# Altium PCB SKC_PCB.PcbDoc (part 2 of 3)
Units mm, origin at the board's own origin, x right, y up, seen from the top; angles counter-clockwise.
Board outline 160.02 x 100.08 mm, 2 copper layers (Top Layer, Bottom Layer); 399 components, 429 nets, 1319 pads, 182 vias.
Unrouted connection lines stored in the file: 43.
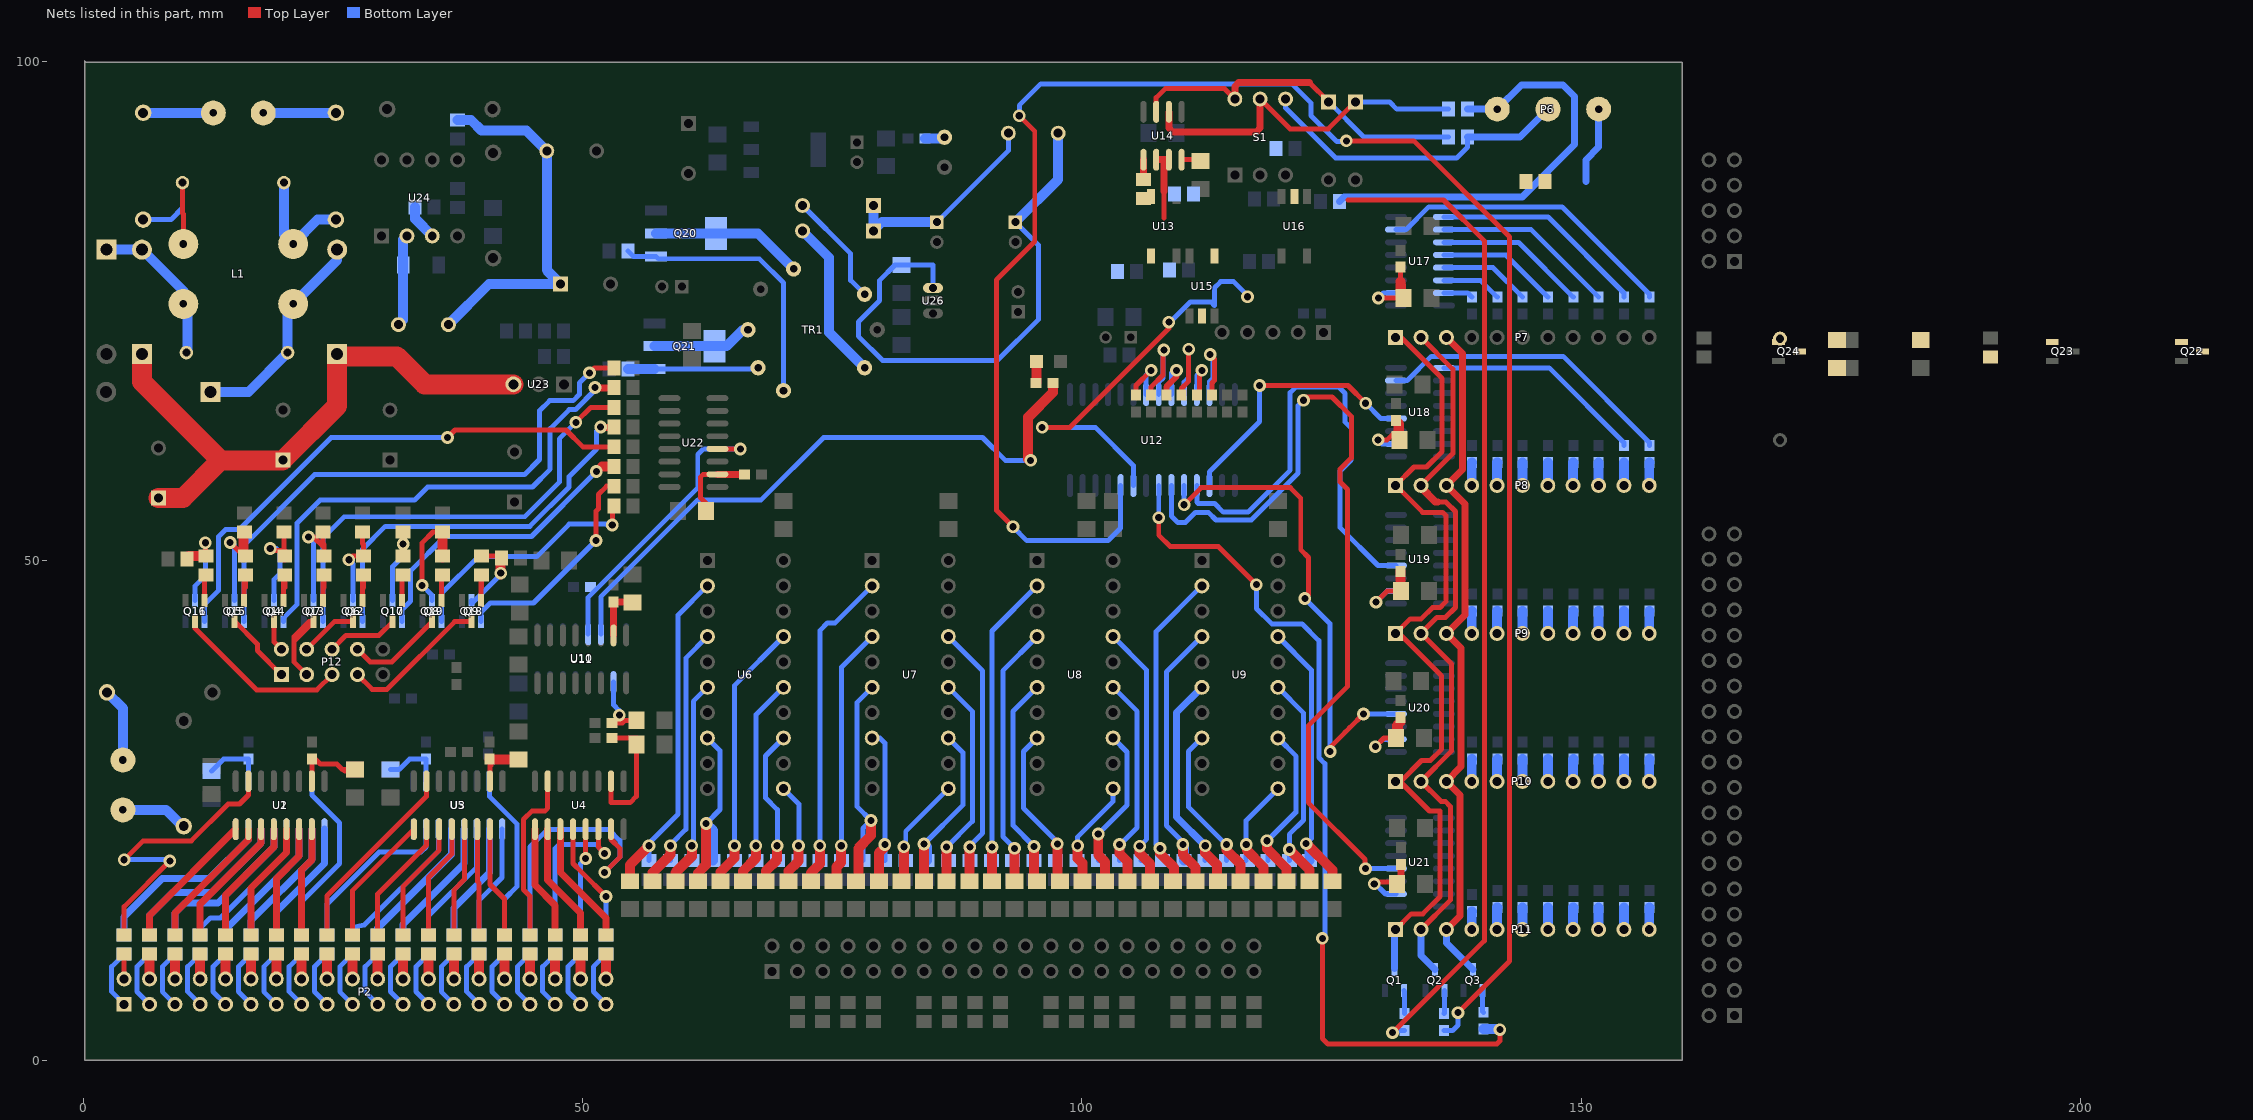
[diagram p2: the nets of this part, all layers, seen from the top]

## Via types
v1: diameter 1.27, hole 0.711, Top Layer to Bottom Layer, 182 vias

## Nets (pads, with @x,y where several pads share a name; then routed paths per layer and width w, separated by ;. In a path a pad name is that pad's centre, name@x,y a point inside that pad or via, vN(x,y) a via of type N, cw(c..) or ccw(c..) an arc to the next point about the centre after c; other vN are vias at no path point) (continued)
DISP2_LATCH: U12.3 U18.12 | length 27.1
  Top Layer w0.5: v1(117.805,67.564) 126.644,67.564 v1(128.422,65.786)
  Bottom Layer w0.5: U12.3@112.776,57.553 112.776,58.928 117.805,63.957 v1(117.805,67.564) ; v1(128.422,65.786) 129.946,64.262 U18.12@131.458,64.262
DISP2_SEG_A: P8.11 R145.2 | length 2.3
  Bottom Layer w1: P8.11@156.828,57.563 156.828,59.839 R145.2@156.845,59.856
DISP2_SEG_B: P8.10 R146.2 | length 2.3
  Bottom Layer w1: P8.10@154.288,57.563 154.288,59.839 R146.2@154.305,59.856
DISP2_SEG_C: P8.9 R147.2 | length 2.3
  Bottom Layer w1: P8.9@151.748,57.563 151.748,59.839 R147.2@151.765,59.856
DISP2_SEG_D: P8.8 R149.2 | length 2.3
  Bottom Layer w1: P8.8@149.208,57.563 149.208,59.839 R149.2@149.225,59.856
DISP2_SEG_DP: P8.4 R153.2 | length 2.3
  Bottom Layer w1: P8.4@139.048,57.563 139.048,59.839 R153.2@139.065,59.856
DISP2_SEG_E: P8.7 R150.2 | length 2.3
  Bottom Layer w1: P8.7@146.668,57.563 146.668,59.839 R150.2@146.685,59.856
DISP2_SEG_F: P8.6 R151.2 | length 2.3
  Bottom Layer w1: P8.6@144.128,57.563 144.128,59.839 R151.2@144.145,59.856
DISP2_SEG_G: P8.5 R152.2 | length 2.3
  Bottom Layer w1: P8.5@141.588,57.563 141.588,59.839 R152.2@141.605,59.856
DISP3_LATCH: U12.4 U19.12 | length 48.3
  Bottom Layer w0.5: U12.4@111.506,57.553 111.506,55.88 111.638,55.748 113.292,55.748 114.168,54.872 116.634,54.872 120.853,59.091 120.853,66.85 121.412,67.41 125.727,67.41 126.365,66.772 126.365,63.892 126.979,63.279 126.979,60.1 125.861,58.983 125.861,53.33 129.661,49.53 U19.12@131.458,49.53
DISP3_SEG_A: P9.11 R154.2 | length 2.3
  Bottom Layer w1: P9.11@156.828,42.735 156.828,44.98 R154.2@156.845,44.997
DISP3_SEG_B: P9.10 R155.2 | length 2.3
  Bottom Layer w1: P9.10@154.288,42.735 154.288,44.98 R155.2@154.305,44.997
DISP3_SEG_C: P9.9 R156.2 | length 2.3
  Bottom Layer w1: P9.9@151.748,42.735 151.748,44.98 R156.2@151.765,44.997
DISP3_SEG_D: P9.8 R158.2 | length 2.3
  Bottom Layer w1: P9.8@149.208,42.735 149.208,44.98 R158.2@149.225,44.997
DISP3_SEG_DP: P9.4 R163.2 | length 2.3
  Bottom Layer w1: P9.4@139.048,42.735 139.048,44.98 R163.2@139.065,44.997
DISP3_SEG_E: P9.7 R159.2 | length 2.3
  Bottom Layer w1: P9.7@146.668,42.735 146.668,44.98 R159.2@146.685,44.997
DISP3_SEG_F: P9.6 R160.2 | length 2.3
  Bottom Layer w1: P9.6@144.128,42.735 144.128,44.98 R160.2@144.145,44.997
DISP3_SEG_G: P9.5 R162.2 | length 2.3
  Bottom Layer w1: P9.5@141.588,42.735 141.588,44.98 R162.2@141.605,44.997
DISP4_LATCH: U12.5 U20.12 | length 50.1
  Top Layer w0.5: v1(110.236,55.626) 111.938,57.328 120.879,57.328 121.92,56.286 121.92,51.119 122.703,50.335 122.703,46.605 v1(122.326,46.228) ; v1(124.866,30.912) 124.866,31.339 126.373,32.845 126.373,32.85 126.815,33.291 126.819,33.291 v1(128.199,34.671)
  Bottom Layer w0.5: v1(110.236,55.626) U12.5@110.236,57.553 ; v1(122.326,46.228) 124.842,43.713 124.842,30.936 v1(124.866,30.912) ; v1(128.199,34.671) U20.12@131.458,34.671
DISP4_SEG_A: P10.11 R164.2 | length 2.2
  Bottom Layer w1: P10.11@156.828,27.908 156.828,30.121 R164.2@156.845,30.138
DISP4_SEG_B: P10.10 R165.2 | length 2.2
  Bottom Layer w1: P10.10@154.288,27.908 154.288,30.121 R165.2@154.305,30.138
DISP4_SEG_C: P10.9 R166.2 | length 2.2
  Bottom Layer w1: P10.9@151.748,27.908 151.748,30.121 R166.2@151.765,30.138
DISP4_SEG_D: P10.8 R168.2 | length 2.2
  Bottom Layer w1: P10.8@149.208,27.908 149.208,30.121 R168.2@149.225,30.138
DISP4_SEG_DP: P10.4 R173.2 | length 2.2
  Bottom Layer w1: P10.4@139.048,27.908 139.048,30.121 R173.2@139.065,30.138
DISP4_SEG_E: P10.7 R169.2 | length 2.2
  Bottom Layer w1: P10.7@146.668,27.908 146.668,30.121 R169.2@146.685,30.138
DISP4_SEG_F: P10.6 R170.2 | length 2.2
  Bottom Layer w1: P10.6@144.128,27.908 144.128,30.121 R170.2@144.145,30.138
DISP4_SEG_G: P10.5 R172.2 | length 2.2
  Bottom Layer w1: P10.5@141.588,27.908 141.588,30.121 R172.2@141.605,30.138
DISP5_LATCH: U12.6 U21.12 | length 84.7
  Top Layer w0.5: v1(122.199,66.091) 122.53,66.421 125.052,66.421 126.99,64.484 126.99,60.315 125.857,59.182 125.857,57.916 126.621,57.152 126.621,37.43 122.682,33.491 122.682,25.781 128.372,20.091 v1@128.372,19.71
  Bottom Layer w0.5: U12.6@108.966,57.553 108.966,54.483 109.601,53.848 110.363,53.848 111.375,54.86 112.67,54.86 113.428,54.102 116.967,54.102 121.666,58.801 121.666,65.557 v1(122.199,66.091) ; v1@128.245,19.177 U21.12@131.458,19.177
  other v1: 128.397,19.177
DISP5_SEG_A: P11.11 R174.2 | length 2.2
  Bottom Layer w1: P11.11@156.828,13.081 156.828,15.262 R174.2@156.845,15.279
DISP5_SEG_B: P11.10 R175.2 | length 2.2
  Bottom Layer w1: P11.10@154.288,13.081 154.288,15.262 R175.2@154.305,15.279
DISP5_SEG_C: P11.9 R176.2 | length 2.2
  Bottom Layer w1: P11.9@151.748,13.081 151.748,15.262 R176.2@151.765,15.279
DISP5_SEG_D: P11.8 R178.2 | length 2.2
  Bottom Layer w1: P11.8@149.208,13.081 149.208,15.262 R178.2@149.225,15.279
DISP5_SEG_DP: P11.4 R183.2 | length 1.8
  Bottom Layer w1: P11.4@139.048,13.081 139.048,14.881 R183.2@139.065,14.898
DISP5_SEG_E: P11.7 R179.2 | length 2.2
  Bottom Layer w1: P11.7@146.668,13.081 146.668,15.262 R179.2@146.685,15.279
DISP5_SEG_F: P11.6 R180.2 | length 2.2
  Bottom Layer w1: P11.6@144.128,13.081 144.128,15.262 R180.2@144.145,15.279
DISP5_SEG_G: P11.5 R182.2 | length 2.2
  Bottom Layer w1: P11.5@141.588,13.081 141.588,15.262 R182.2@141.605,15.279
DISP_DIG1: P7.3 P8.3 P9.3 P10.3 P11.3 Q3.3 | length 69.7
  Top Layer w0.7: P11.3@136.508,13.081 137.86,14.433 137.86,26.556 P10.3@136.508,27.908 137.987,29.387 137.987,41.256 P9.3@136.508,42.735 138.368,44.596 138.368,55.703 P8.3@136.508,57.563 138.114,59.169 138.114,70.784 P7.3@136.508,72.39
  Bottom Layer w0.7: P11.3@136.508,13.081 136.508,11.735 Q3.3@139.192,9.051
DISP_DIG2: P7.2 P8.2 P9.2 P10.2 P11.2 Q2.3 | length 78.4
  Top Layer w0.5: P11.2@133.968,13.081 136.906,16.019 136.906,25.4 136.398,25.908 135.968,25.908 P10.2@133.968,27.908 137.033,30.973 137.033,39.67 P9.2@133.968,42.735 135.555,44.323 136.398,44.323 137.414,45.339 137.414,54.943 136.477,55.88 135.651,55.88 P8.2@133.968,57.563 137.16,60.755 137.16,69.198 P7.2@133.968,72.39
  Top Layer w0.7: P10.2@133.968,27.703 P10.2@133.968,27.908 ; P8.2@133.968,57.563 133.968,57.294 135.382,55.88 135.651,55.88
  Bottom Layer w0.7: P11.2@133.968,13.081 133.968,10.465 Q2.3@135.382,9.051
DISP_DIG3: P7.1 P8.1 P9.1 P10.1 P11.1 Q1.3 | length 84.8
  Top Layer w0.5: P11.1@131.428,13.081 132.991,14.644 134.151,14.644 135.89,16.383 135.89,24.954 134.812,24.954 131.858,27.908 P10.1@131.428,27.908 131.921,27.908 134.013,30 134.902,30 136.034,31.132 136.034,38.464 131.762,42.735 P9.1@131.428,42.735 132.888,44.196 133.985,44.196 135.128,45.339 135.89,45.339 136.46,45.909 136.46,54.548 136.144,54.864 134.127,54.864 P8.1@131.428,57.563 133.263,59.397 134.516,59.397 136.079,60.96 136.079,68.264 131.953,72.39 P7.1@131.428,72.39
  Top Layer w0.7: P11.1@131.318,13.191 P11.1@131.428,13.081
  Bottom Layer w0.7: Q1.3@131.301,9.161 P11.1@131.301,13.081
DISP_DIG_1: R161.2 U12.9 | length 141.4
  Top Layer w0.5: v1(96.012,63.373) 98.806,63.373 108.712,73.279 v1(108.712,73.914) ; 126.67,86.157 136.22,86.157 140.31,82.067 140.31,11.938 v1(131.115,2.743)
  Bottom Layer w0.5: v1(96.012,63.373) 101.346,63.373 105.156,59.563 U12.9@105.156,57.553 ; v1(108.712,73.914) 108.712,73.787 110.871,75.946 112.912,75.946 113.289,75.57 113.289,77.348 113.903,77.962 115.205,77.962 v1@116.459,76.708 ; v1(131.115,2.743) 131.332,2.96 R161.2@132.334,2.96
  other v1: 116.586,76.454
DISP_DIG_10: R171.2 U12.10 | length 201.1
  Top Layer w0.5: v1(93.091,53.416) 91.44,55.067 91.44,78.156 95.275,81.991 95.275,93.04 v1(93.726,94.59) ; v1(126.492,92.075) 133.223,92.075 142.85,82.448 142.85,9.928 v1(137.668,4.746)
  Bottom Layer w0.5: v1(93.091,53.416) 94.488,52.019 102.616,52.019 103.886,53.289 U12.10@103.886,57.553 ; v1(93.726,94.59) 93.726,95.631 95.885,97.79 121.031,97.79 122.936,95.885 122.936,94.615 125.539,92.011 v1@126.428,92.011 ; R171.2@136.271,2.96 137.132,2.96 137.668,3.496 v1(137.668,4.746)
DISP_DIG_100: R181.2 U12.7 | length 90
  Top Layer w0.5: v1(107.696,54.331) 107.696,52.578 108.839,51.435 113.665,51.435 117.64,47.46 117.805,47.625 v1(117.475,47.625) ; v1(124.079,12.192) 124.079,2.159 124.634,1.604 141.558,1.604 141.859,1.905 v1(141.859,3.048)
  Bottom Layer w0.5: v1(107.696,54.331) U12.7@107.696,57.553 ; v1(117.475,47.625) 117.805,47.625 117.475,47.955 117.475,45.237 119.024,43.688 122.051,43.688 123.727,42.012 123.727,30.298 124.333,29.693 124.333,12.192 v1(124.079,12.192)
  Bottom Layer w1: R181.2@140.208,3.087 141.82,3.087 v1(141.859,3.048)
ERR1_LATCH: R221.1 U10.5 U22.12 | length 29.3
  Top Layer w0.5: U22.12@63.487,61.214 v1(65.786,61.214)
  Bottom Layer w0.5: U10.5@50.546,42.659 50.546,46.355 61.519,57.328 61.519,60.655 62.078,61.214 v1(65.786,61.214)
NetC2_2: C2.2 R4.1 U1.10 | length 6.4
  Bottom Layer w0.5: C2.2@12.827,28.959 14.006,30.138 R4.1@16.51,30.138 U1.10@16.51,27.927
NetC4_2: C4.2 R13.1 U2.10 | length 8.6
  Top Layer w0.5: U2.10@22.86,27.927 R13.1@22.86,30.138 23.241,30.138 23.737,29.642 25.375,29.642 25.93,29.086 26.032,29.086 ; C4.2@27.178,29.086 26.032,29.086 ; C4.2@27.559,29.086 27.429,28.956 26.162,28.956 26.032,29.086
NetC6_2: C6.2 R22.1 U3.10 | length 5.2
  Top Layer w0.5: U3.10@40.703,27.927 40.703,29.464 ; R22.1@40.703,30.075 40.703,29.464 ; 40.785,29.482 40.703,29.464
  Top Layer w1: R22.1@40.64,30.138 40.682,30.096 C6.2@43.561,30.096
NetC8_2: C8.2 R31.1 U4.10 | length 13.4
  Top Layer w0.5: U4.10@52.832,27.927 52.832,25.789 54.742,25.789 55.369,26.416 C8.2@55.369,31.623 55.369,32.258 R31.1@52.92,32.258
  Top Layer w0.7: R31.1@52.832,32.17 R31.1@52.92,32.258
NetC10_2: C10.2 R42.1 U5.10 | length 6.2
  Bottom Layer w0.5: C10.2@30.734,29.086 31.598,29.086 32.65,30.138 R42.1@34.29,30.138 U5.10@34.29,27.927
NetC12_1: C12.1 R56.2 U6.2 | length 34.3
  Top Layer w1: C12.1@54.737,17.91 54.737,19.558 v1(56.642,21.463)
  Bottom Layer w0.5: R56.2@56.642,20 v1(56.642,21.463) 56.642,21.717 59.563,24.638 59.563,44.577 U6.2@62.484,47.498
NetC13_1: C13.1 R57.2 U6.4 | length 28
  Top Layer w1: C13.1@57.003,17.91 57.003,18.776 58.801,20.574 v1@58.801,21.209
  Bottom Layer w0.5: R57.2@58.785,20 58.785,21.574 60.325,23.114 60.325,40.259 U6.4@62.484,42.418
  other v1: 58.781,21.463
NetC14_1: C14.1 R58.2 U6.6 | length 22.2
  Top Layer w1: C14.1@59.268,17.91 59.268,18.755 60.919,20.406 v1(60.919,21.463)
  Bottom Layer w0.5: R58.2@60.927,20 61.079,20.152 61.079,35.933 U6.6@62.484,37.338
NetC15_1: C15.1 R59.2 U6.8 | length 19.8
  Top Layer w1: C15.1@61.534,17.91 61.534,18.735 62.357,19.558 v1(62.357,23.698)
  Bottom Layer w0.5: v1(62.357,23.698) 63.754,25.095 63.754,30.988 U6.8@62.484,32.258
  Bottom Layer w1: v1(62.357,23.698) 63.07,22.985 R59.2@63.07,20
NetC16_2: C16.2 R63.2 U6.17 | length 28.4
  Top Layer w1: C16.2@63.799,18.161 63.799,18.841 65.196,20.238 v1(65.196,21.463)
  Bottom Layer w0.5: v1(65.196,21.463) v1@65.212,21.524 ; R63.2@65.212,20 v1@65.212,21.524 ; U6.17@70.104,42.418 65.212,37.526 v1@65.212,21.524
NetC17_2: C17.2 R62.2 U6.15 | length 22.6
  Top Layer w1: C17.2@66.065,17.91 66.065,18.948 67.335,20.218 v1(67.335,21.463)
  Bottom Layer w0.5: R62.2@67.355,20 67.355,34.589 U6.15@70.104,37.338
NetC18_2: C18.2 R61.2 U6.13 | length 16.6
  Top Layer w1: 68.33,18.832 68.33,18.927 69.473,20.07 v1(69.473,21.463)
  Bottom Layer w0.5: R61.2@69.498,20 69.498,25.076 68.309,26.265 68.309,30.463 U6.13@70.104,32.258
NetC19_2: C19.2 R60.2 U6.11 | length 11.6
  Top Layer w0.5: 71.612,19.971 71.64,20
  Top Layer w1: C19.2@70.612,18.161 70.612,18.923 71.612,19.923 71.612,19.971 v1(71.612,21.463)
  Bottom Layer w0.5: U6.11@70.104,27.178 71.64,25.642 R60.2@71.64,20
NetC21_1: C21.1 R72.2 U7.2 | length 35.6
  Top Layer w0.5: C21.1@72.861,17.91 72.861,18.759 72.861,19.078 73.75,19.967 73.783,20
  Top Layer w1: 72.861,18.759 73.75,19.648 73.75,19.967 v1(73.75,21.463)
  Bottom Layer w0.5: R72.2@73.783,20 73.783,43.049 74.521,43.787 75.283,43.787 U7.2@78.994,47.498
NetC22_1: C22.1 R73.2 U7.4 | length 27.6
  Top Layer w0.5: C22.1@75.127,17.91 C22.1@75.127,18.231 ; 75.889,19.963 75.926,20
  Top Layer w1: C22.1@75.127,18.231 75.438,18.542 75.438,19.361 75.889,19.812 75.889,19.963 v1(75.889,21.463)
  Bottom Layer w0.5: R73.2@75.926,20 75.926,39.35 U7.4@78.994,42.418
NetC23_1: C23.1 R74.2 U7.6 | length 25.6
  Top Layer w1: C23.1@77.392,17.91 77.597,18.115 77.597,21.209 78.867,22.479 v1(78.867,24.003)
  Bottom Layer w0.5: R74.2@78.068,20 78.068,23.204 v1(78.867,24.003) 77.49,25.38 77.49,35.834 U7.6@78.994,37.338
NetC24_1: C24.1 R75.2 U7.8 | length 17.2
  Top Layer w0.5: v1@80.264,21.336 v1(80.264,21.59)
  Top Layer w1: C24.1@79.658,17.91 79.658,20.73 v1@80.264,21.336
  Bottom Layer w0.5: U7.8@78.994,32.258 79.756,32.258 80.264,31.75 v1(80.264,21.59) 80.264,20 R75.2@80.211,20
NetC25_2: C25.2 R79.2 U7.17 | length 27.8
  Top Layer w1: C25.2@88.72,17.91 v1@88.72,21.336
  Bottom Layer w0.5: U7.17@86.614,42.418 90.043,38.989 90.043,22.733 88.781,21.471 R79.2@88.781,20
  other v1: 88.773,21.336
NetC26_2: C26.2 R78.2 U7.15 | length 22.6
  Top Layer w1: C26.2@86.454,17.91 v1(86.454,21.336)
  Bottom Layer w0.5: v1(86.454,21.336) 89.027,23.909 89.027,34.925 U7.15@86.614,37.338 ; R78.2@86.639,20 v1@86.639,21.152
NetC27_2: C27.2 R77.2 U7.13 | length 17.9
  Top Layer w1: C27.2@84.189,17.91 v1(84.189,21.642)
  Bottom Layer w0.5: v1(84.189,21.642) 88.073,25.527 88.073,30.799 U7.13@86.614,32.258
  Bottom Layer w1: R77.2@84.496,20 v1@84.496,21.335
NetC28_2: C28.2 R76.2 U7.11 | length 17.2
  Top Layer w0.5: C28.2@81.923,17.91 81.923,18.872 82.169,19.118 v1(82.169,21.361)
  Top Layer w1: C28.2@82.177,18.037 v1@82.177,21.209
  Bottom Layer w0.5: v1(82.169,21.361) 82.169,20 R76.2@82.353,20 82.353,22.917 U7.11@86.614,27.178
NetC30_1: C30.1 R88.2 U8.2 | length 32.7
  Top Layer w1: C30.1@90.985,17.91 v1(90.985,21.336)
  Bottom Layer w0.5: R88.2@90.924,20 v1@90.924,21.275 ; v1(90.985,21.336) 90.985,42.979 U8.2@95.504,47.498
NetC31_1: C31.1 R89.2 U8.4 | length 26.4
  Top Layer w1: C31.1@93.251,17.91 v1(93.251,21.209)
  Bottom Layer w0.5: v1(93.251,21.209) 92.075,22.385 92.075,38.989 U8.4@95.504,42.418
NetC32_1: C32.1 R90.2 U8.6 | length 22.9
  Top Layer w1: v1@95.135,21.463 v1(95.209,21.389) 95.209,18.217 C32.1@95.516,17.91
  Bottom Layer w0.5: v1(95.209,21.389) 93.091,23.507 93.091,34.925 U8.6@95.504,37.338
  Bottom Layer w1: R90.2@95.209,20 v1(95.209,21.389)
NetC33_1: C33.1 R91.2 U8.8 | length 19.4
  Top Layer w0.5: v1@97.352,21.598 97.352,22.028 v1(97.536,21.66) v1@97.782,21.168
  Top Layer w1: v1@97.352,21.598 97.536,21.414 97.536,18.156 C33.1@97.782,17.91
  Bottom Layer w0.5: U8.8@95.504,32.258 94.15,30.904 94.15,25.23 97.352,22.028 R91.2@97.352,20
NetC34_2: C34.2 R95.2 U8.17 | length 27.9
  Top Layer w1: v1(105.791,21.426) 105.791,20.701 106.844,19.648 C34.2@106.844,17.91
  Bottom Layer w0.5: U8.17@103.124,42.418 106.488,39.054 106.488,22.123 v1(105.791,21.426) ; R95.2@105.922,20 v1@105.922,21.295
NetC35_2: C35.2 R94.2 U8.15 | length 23.1
  Top Layer w1: v1(103.759,21.59) 103.759,20.701 104.578,19.882 C35.2@104.578,17.91
  Bottom Layer w0.5: U8.15@103.124,37.338 105.534,34.928 105.534,23.291 103.779,21.537 R94.2@103.779,20
NetC36_2: C36.2 R93.2 U8.13 | length 19
  Top Layer w1: v1(101.637,22.643) 101.637,20.537 102.313,19.861 C36.2@102.313,17.91
  Bottom Layer w0.5: R93.2@101.637,20 v1(101.637,22.643) 104.521,25.527 104.521,30.861 U8.13@103.124,32.258
NetC37_2: C37.2 R92.2 U8.11 | length 12.3
  Top Layer w1: v1(99.568,21.463) 99.568,20.193 100.047,19.714 C37.2@100.047,17.91
  Bottom Layer w0.5: R92.2@99.494,20 v1@99.494,21.389 ; v1(99.568,21.463) 99.568,22.352 103.124,25.908 U8.11@103.124,27.178
NetC39_1: C39.1 R104.2 U9.2 | length 32.1
  Top Layer w1: v1(107.823,21.209) 107.823,20.701 109.22,19.304 C39.1@109.22,18.034
  Bottom Layer w0.5: v1(107.823,21.209) 107.442,21.59 107.442,42.926 U9.2@112.014,47.498
NetC40_1: C40.1 R105.2 U9.4 | length 28.7
  Top Layer w1: v1(110.109,21.59) 110.109,20.574 111.375,19.308 C40.1@111.375,17.91
  Bottom Layer w0.5: v1(110.109,21.59) 110.109,21.844 108.458,23.495 108.458,38.862 U9.4@112.014,42.418
  Bottom Layer w1: R105.2@110.207,20 v1@110.207,21.492
NetC41_1: C41.1 R106.2 U9.6 | length 23.6
  Top Layer w1: v1@112.243,21.463 v1@112.244,21.472 ; v1(112.35,21.463) 112.35,20.746 113.513,19.583 C41.1@113.513,17.91
  Bottom Layer w0.5: R106.2@112.35,20 v1(112.35,21.463)
  Bottom Layer w0.7: U9.6@112.014,37.338 109.474,34.798 109.474,24.339 v1(112.35,21.463)
NetC42_1: C42.1 R107.2 U9.8 | length 18.7
  Top Layer w1: v1(114.493,21.59) 114.493,21.016 115.906,19.603 C42.1@115.906,17.91
  Bottom Layer w0.5: U9.8@112.014,32.258 110.66,30.904 110.66,25.357 114.493,21.524 R107.2@114.493,20
NetC43_2: C43.2 R111.2 U9.17 | length 28.5
  Top Layer w1: v1(122.465,21.674) 125.095,19.044 C43.2@125.095,17.91
  Bottom Layer w0.5: U9.17@119.634,42.418 122.973,39.079 122.973,22.182 v1(122.465,21.674)
  Bottom Layer w1: R111.2@122.809,20 v1@122.809,21.33
NetC44_2: C44.2 R110.2 U9.15 | length 23
  Top Layer w1: v1(120.777,21.082) 122.798,19.061 C44.2@122.798,17.91
  Bottom Layer w0.5: U9.15@119.634,37.338 122.219,34.753 122.219,24.048 120.777,22.606 R110.2@120.777,20
NetC45_2: C45.2 R109.2 U9.13 | length 23.2
  Top Layer w1: v1(118.542,21.971) 118.542,21.158 120.5,19.2 C45.2@120.5,17.91
  Bottom Layer w0.5: v1(118.542,21.971) 121.465,24.894 ; R109.2@118.618,20 118.618,21.971 121.465,24.818 121.465,24.894 ; U9.13@119.634,32.258 121.465,30.427 121.465,24.894
NetC46_2: C46.2 R108.2 U9.11 | length 12.7
  Top Layer w1: v1@116.52,21.463 116.52,21.021 118.203,19.338 C46.2@118.203,17.91
  Bottom Layer w0.5: R108.2@116.459,20 116.459,24.003 U9.11@119.634,27.178
  other v1: 116.459,21.59
NetC49_2: C49.2 R112.2 U10.10 | length 6.1
  Top Layer w0.5: R112.2@52.92,33.782 53.67,33.782 54,33.782 54.254,34.036 C49.2@55.369,34.036
  Bottom Layer w0.5: U10.10@53.086,37.859 53.086,35.585 53.67,35.001 v1(53.67,34.544)
NetC50_2: C50.2 R113.2 U11.10 | length 5.3
  Top Layer w0.7: U11.10@53.086,42.532 R113.2@53.086,45.886 54.949,45.886 C50.2@54.991,45.844
NetC56_2: C56.2 R139.1 U17.10 | length 9.1
  Top Layer w0.5: v1(129.692,76.327) C56.2@132.204,76.327 132.204,77.699 131.904,77.999 R139.1@131.904,79.414
  Top Layer w1: C56.2@131.904,76.627 131.904,77.999
  Bottom Layer w0.5: v1(129.692,76.327) 130.2,76.835 U17.10@131.458,76.835
NetC58_2: C58.2 R148.1 U18.10 | length 8.5
  Top Layer w0.5: v1(129.667,62.128) 130.581,62.128 C58.2@131.445,62.992 ; R148.1@131.445,64.047 C58.2@131.445,62.992 ; C58.2@131.823,62.103 131.777,62.103 131.445,62.103 C58.2@131.445,62.992
  Top Layer w1: R148.1@131.445,64.047 131.777,63.715 C58.2@131.777,62.103
  Bottom Layer w0.5: v1(129.667,62.128) 130.073,61.722 U18.10@131.458,61.722
NetC60_2: C60.2 R157.1 U19.10 | length 7.4
  Top Layer w0.5: v1(129.464,45.872) 130.581,46.99 C60.2@131.95,46.99
  Top Layer w1: R157.1@131.904,48.934 131.904,47.036 C60.2@131.95,46.99
  Bottom Layer w0.5: v1(129.464,45.872) 130.581,46.99 U19.10@131.458,46.99
NetC62_2: C62.2 R167.1 U20.10 | length 9.1
  Top Layer w0.5: v1(129.388,31.394) 130.251,32.258 131.569,32.258 131.904,32.258 131.904,33.86 R167.1@131.904,34.329
  Top Layer w1: C62.2@131.569,32.258 131.572,32.261 131.572,33.528 R167.1@131.904,33.86
  Bottom Layer w0.5: v1(129.388,31.394) 130.124,32.131 U20.10@131.458,32.131
NetC64_2: C64.2 R177.1 U21.10 | length 7.4
  Top Layer w0.5: v1@129.184,17.856 C64.2@131.064,17.856 ; C64.2@131.569,17.653 C64.2@131.953,17.653
  Top Layer w0.7: C64.2@131.953,17.275 131.953,17.653 R177.1@131.953,19.597
  Bottom Layer w0.5: v1@129.184,17.856 130.404,16.637 U21.10@131.458,16.637
  other v1: 129.286,17.653
NetC66_2: C66.2 R198.1 U22.10 | length 8.2
  Top Layer w0.5: C66.2@62.36,54.991 62.36,55.75 61.814,56.296 61.814,58.42 62.068,58.674 U22.10@63.487,58.674
  Top Layer w0.7: U22.10@63.487,58.674 R198.1@66.206,58.674
NetC67_1: C67.1 C68.1 D4.2 D6.2 U23.3 | length 59.6
  Top Layer w0.5: D4.2@25.4,70.485 D4.2@25.4,70.716
  Top Layer w1: C68.1@19.941,60.071 C68.1@19.981,60.111
  Top Layer w2: D6.2@5.842,70.716 5.842,67.945 13.716,60.071 ; C67.1@7.493,56.301 9.946,56.301 13.716,60.071 ; C68.1@19.941,60.071 13.716,60.071 ; C68.1@19.981,60.111 25.4,65.53 25.4,70.485 31.369,70.485 34.163,67.691 U23.3@43.053,67.691
NetC73_1: C73.1 L1.3 R212.1 | length 13.1
  Top Layer w0.5: C73.1@9.906,87.884 9.906,84.848 9.994,84.76 L1.3@9.994,81.74
  Bottom Layer w0.5: R212.1@5.969,84.185 8.747,84.185 9.906,85.344 C73.1@9.906,87.884
NetC73_2: C73.2 L1.1 R209.1 | length 11.8
  Bottom Layer w1: C73.2@20.066,87.884 20.066,82.668 L1.1@20.994,81.74 23.439,84.185 R209.1@25.273,84.185
NetC75_1: C75.1 D6.1 D7.2 L1.4 | length 15.8
  Bottom Layer w1: D7.2@2.286,81.176 D6.1@5.842,81.176 9.994,77.024 L1.4@9.994,75.74 10.414,75.32 10.414,70.993 C75.1@10.287,70.866
NetC75_2: C75.2 D4.1 D5.2 L1.2 | length 21.7
  Bottom Layer w1: D5.2@12.723,66.929 16.51,66.929 C75.2@20.447,70.866 20.447,75.193 L1.2@20.994,75.74 25.4,80.146 D4.1@25.4,81.176
NetC77_2: C77.2 U24.3 | length 3.6
  Bottom Layer w1: C77.2@33.213,85.471 33.213,84.262 U24.3@34.925,82.55
NetC78_1: C78.1 L2.2 L3.1 R216.2 | length 37.1
  Bottom Layer w1: L2.2@36.536,73.66 40.6,77.724 C78.1@47.792,77.724 46.395,79.121 L3.1@46.395,91.059 44.363,93.091 39.878,93.091 38.801,94.168 R216.2@37.465,94.168
NetC84_2: C84.2 C86.1 L4.2 U26.3 | length 56.9
  Bottom Layer w0.5: U26.3@85.09,77.343 85.09,79.632 C84.2@81.915,79.632 81.283,79.632 79.748,78.097 79.748,76.08 77.597,73.929 77.597,72.517 80.043,70.071 91.534,70.071 95.631,74.168 95.631,81.645 C86.1@93.345,83.931
  Bottom Layer w1: C86.1@93.345,83.931 97.623,88.209 L4.2@97.623,92.837
NetC88_1: C88.1 D10.2 D11.2 L4.1 | length 21.1
  Bottom Layer w0.5: C88.1@85.471,83.931 92.623,91.083 L4.1@92.623,92.837
  Bottom Layer w1: D10.2@79.115,85.598 D11.2@79.115,83.058 79.988,83.931 C88.1@85.471,83.931
NetD1_2: D1.2 R116.2 | length 2.2
  Top Layer w1: R116.2@95.416,67.818 95.447,67.849 D1.2@95.447,69.977 D1.2@95.416,69.946
NetD2_2: D2.2 R131.2 S1.5 U14.6 | length 35.5
  Top Layer w0.5: S1.5@117.856,96.266 120.843,93.279 124.685,93.279 D2.2@127.381,95.975
  Top Layer w0.7: U14.6@108.712,94.983 108.712,93.345 109.093,92.964 117.475,92.964 117.856,93.345 S1.5@117.856,96.266
  Bottom Layer w0.5: D2.2@127.381,95.975 130.812,95.975 131.537,95.25 R131.2@136.718,95.25
NetD3_2: D3.2 R132.2 S1.6 U14.7 | length 35.4
  Top Layer w0.5: U14.7@107.442,94.983 107.442,96.393 108.348,97.299 114.283,97.299 S1.6@115.316,96.266 ; 122.791,97.899 D3.2@124.714,95.975
  Top Layer w0.7: S1.6@115.189,96.139 S1.6@115.316,96.266 115.316,97.536 115.697,97.917 122.809,97.917 122.791,97.899
  Bottom Layer w0.5: D3.2@124.714,95.975 128.233,92.456 R132.2@136.718,92.456
NetD8_2: D8.2 L2.1 U24.2 | length 9.2
  Bottom Layer w1: L2.1@31.536,73.66 32.007,74.131 D8.2@32.007,79.629 32.007,82.172 U24.2@32.385,82.55
NetD9_2: D9.2 R218.2 | length 2
  Bottom Layer w1: R218.2@84.289,92.329 86.13,92.329 D9.2@86.233,92.432
NetD10_1: D10.1 TR1.6 | length 11.5
  Bottom Layer w0.5: D10.1@72.015,85.598 76.835,80.778 76.835,78.105 TR1.6@78.232,76.708
NetD11_1: D11.1 TR1.8 | length 16.3
  Bottom Layer w1: D11.1@72.015,83.058 74.676,80.397 74.676,72.898 TR1.8@78.232,69.342
NetP2_1: P2.1 R9.1 | length 6.1
  Bottom Layer w0.5: P2.1@4.064,5.588 2.81,6.842 2.81,9.353 R9.1@4.064,10.607
NetP2_2: P2.2 R10.1 | length 2.5
  Top Layer w0.5: P2.2@4.064,8.128 4.064,9.116 R10.1@4.064,10.607
NetP2_3: P2.3 R8.1 | length 6.1
  Bottom Layer w0.5: P2.3@6.604,5.588 5.35,6.842 5.35,9.353 R8.1@6.604,10.607
NetP2_4: P2.4 R11.1 | length 2.5
  Top Layer w1: P2.4@6.604,8.128 R11.1@6.604,10.607
NetP2_5: P2.5 R7.1 | length 6.1
  Bottom Layer w0.5: P2.5@9.144,5.588 7.89,6.842 7.89,9.353 R7.1@9.144,10.607
NetP2_6: P2.6 R12.1 | length 2.5
  Top Layer w1: P2.6@9.144,8.128 R12.1@9.144,10.607
NetP2_7: P2.7 R6.1 | length 6.1
  Bottom Layer w0.5: P2.7@11.684,5.588 10.43,6.842 10.43,9.353 R6.1@11.684,10.607
NetP2_8: P2.8 R14.1 | length 2.5
  Top Layer w1: P2.8@11.684,8.128 R14.1@11.684,10.607
NetP2_9: P2.9 R5.1 | length 6.1
  Bottom Layer w0.5: P2.9@14.224,5.588 12.97,6.842 12.97,9.353 R5.1@14.224,10.607
NetP2_10: P2.10 R15.1 | length 2.5
  Top Layer w1: P2.10@14.224,8.128 R15.1@14.224,10.607
NetP2_11: P2.11 R3.1 | length 6.1
  Bottom Layer w0.5: P2.11@16.764,5.588 15.51,6.842 15.51,9.353 R3.1@16.764,10.607
NetP2_12: P2.12 R16.1 | length 2.5
  Top Layer w1: P2.12@16.764,8.128 R16.1@16.764,10.607
NetP2_13: P2.13 R2.1 | length 6.1
  Bottom Layer w0.5: P2.13@19.304,5.588 18.05,6.842 18.05,9.353 R2.1@19.304,10.607
NetP2_14: P2.14 R17.1 | length 2.5
  Top Layer w1: P2.14@19.304,8.128 R17.1@19.304,10.607
NetP2_15: P2.15 R1.1 | length 6.1
  Bottom Layer w0.5: P2.15@21.844,5.588 20.59,6.842 20.59,9.353 R1.1@21.844,10.607
NetP2_16: P2.16 R18.1 | length 2.5
  Top Layer w1: P2.16@21.844,8.128 R18.1@21.844,10.607
NetP2_17: P2.17 R47.1 | length 6.1
  Bottom Layer w0.5: P2.17@24.384,5.588 23.13,6.842 23.13,9.353 R47.1@24.384,10.607
NetP2_18: P2.18 R19.1 | length 2.5
  Top Layer w1: P2.18@24.384,8.128 R19.1@24.384,10.607
NetP2_19: P2.19 R46.1 | length 6.1
  Bottom Layer w0.5: P2.19@26.924,5.588 25.67,6.842 25.67,9.353 R46.1@26.924,10.607
NetP2_20: P2.20 R20.1 | length 2.5
  Top Layer w1: P2.20@26.924,8.128 R20.1@26.924,10.607
NetP2_21: P2.21 R45.1 | length 6.1
  Bottom Layer w0.5: P2.21@29.464,5.588 28.21,6.842 28.21,9.353 R45.1@29.464,10.607
NetP2_22: P2.22 R21.1 | length 2.5
  Top Layer w1: P2.22@29.464,8.128 R21.1@29.464,10.607
NetP2_23: P2.23 R44.1 | length 6.1
  Bottom Layer w0.5: P2.23@32.004,5.588 30.75,6.842 30.75,9.353 R44.1@32.004,10.607
NetP2_24: P2.24 R23.1 | length 2.5
  Top Layer w1: P2.24@32.004,8.128 R23.1@32.004,10.607
NetP2_25: P2.25 R43.1 | length 6.1
  Bottom Layer w0.5: P2.25@34.544,5.588 33.29,6.842 33.29,9.353 R43.1@34.544,10.607
NetP2_26: P2.26 R24.1 | length 2.5
  Top Layer w1: P2.26@34.544,8.128 R24.1@34.544,10.607
NetP2_27: P2.27 R41.1 | length 6.1
  Bottom Layer w0.5: P2.27@37.084,5.588 35.83,6.842 35.83,9.353 R41.1@37.084,10.607
NetP2_28: P2.28 R25.1 | length 2.5
  Top Layer w1: P2.28@37.084,8.128 R25.1@37.084,10.607
NetP2_29: P2.29 R40.1 | length 6.1
  Bottom Layer w0.5: P2.29@39.624,5.588 38.37,6.842 38.37,9.353 R40.1@39.624,10.607
NetP2_30: P2.30 R26.1 | length 2.5
  Top Layer w1: P2.30@39.624,8.128 R26.1@39.624,10.607
NetP2_31: P2.31 R39.1 | length 6.1
  Bottom Layer w0.5: P2.31@42.164,5.588 40.91,6.842 40.91,9.353 R39.1@42.164,10.607
NetP2_32: P2.32 R27.1 | length 2.5
  Top Layer w1: P2.32@42.164,8.128 R27.1@42.164,10.607
NetP2_33: P2.33 R38.1 | length 6.1
  Bottom Layer w0.5: P2.33@44.704,5.588 43.45,6.842 43.45,9.353 R38.1@44.704,10.607
NetP2_34: P2.34 R28.1 | length 2.5
  Top Layer w1: P2.34@44.704,8.128 R28.1@44.704,10.607
NetP2_35: P2.35 R37.1 | length 6.1
  Bottom Layer w0.5: P2.35@47.244,5.588 45.99,6.842 45.99,9.353 R37.1@47.244,10.607
NetP2_36: P2.36 R29.1 | length 2.5
  Top Layer w1: P2.36@47.244,8.128 R29.1@47.244,10.607
NetP2_37: P2.37 R36.1 | length 6.1
  Bottom Layer w0.5: P2.37@49.784,5.588 48.53,6.842 48.53,9.353 R36.1@49.784,10.607
NetP2_38: P2.38 R30.1 | length 2.5
  Top Layer w1: P2.38@49.784,8.128 R30.1@49.784,10.607
NetP2_39: P2.39 R35.1 | length 6.1
  Bottom Layer w0.5: P2.39@52.324,5.588 51.054,6.858 51.054,9.337 R35.1@52.324,10.607
NetP2_40: P2.40 R34.1 | length 2.5
  Top Layer w1: P2.40@52.324,8.128 R34.1@52.324,10.607
NetP3_1: P3.1 R32.2 | length 6.8
  Bottom Layer w1: P3.1@3.556,25.059 8.274,25.059 R32.2@9.779,23.554
NetP3_2: P3.2 R33.1 | length 7.6
  Bottom Layer w1: R33.1@2.345,36.83 3.937,35.238 3.937,30.44 P3.2@3.556,30.059
NetP6_1: P6.1 R134.2 | length 7.8
  Bottom Layer w0.7: 150.495,88.011 150.495,90.17 151.765,91.44 P6.1@151.765,95.25
NetP6_2: P6.2 R132.1 S1.4 | length 31.9
  Bottom Layer w0.5: S1.4@120.396,96.266 120.396,95.377 125.415,90.358 137.536,90.358 138.618,91.44 R132.1@138.618,92.456
  Bottom Layer w0.7: R132.1@138.618,92.456 143.891,92.456 P6.2@146.685,95.25
NetP6_3: P6.3 R131.1 R230.1 | length 43
  Bottom Layer w0.7: R230.1@125.791,85.979 126.265,86.453 144.111,86.453 149.352,91.694 149.352,96.52 148.209,97.663 144.018,97.663 P6.3@141.605,95.25 R131.1@138.618,95.25
NetP12_1: P12.1 Q5.3 | length 7.2
  Top Layer w0.5: Q5.3@15.186,43.888 17.419,41.656 17.419,41.001 P12.1@19.812,38.608
NetP12_2: P12.2 Q4.3 | length 3.1
  Top Layer w0.5: Q4.3@19.05,43.872 Q4.3@19.086,43.908 19.086,43.017 19.086,41.874 P12.2@19.812,41.148
NetP12_3: P12.3 Q7.3 | length 9.6
  Top Layer w0.5: P12.3@22.352,38.608 21.098,39.862 21.098,41.965 ; 21.098,41.965 Q7.3@23.041,43.908 22.572,43.908 21.098,42.434 21.098,41.965
NetP12_4: P12.4 Q6.3 | length 5.8
  Top Layer w0.5: P12.4@22.352,41.148 25.112,43.908 Q6.3@26.997,43.908
NetP12_5: P12.5 Q16.3 | length 17.6
  Top Layer w0.5: Q16.3@11.176,43.908 11.176,43.221 17.313,37.084 18,37.084 23.368,37.084 P12.5@24.892,38.608
NetP12_6: P12.6 Q17.3 | length 7.2
  Top Layer w0.5: P12.6@24.892,41.148 26.289,42.545 28.321,42.545 29.589,42.545 Q17.3@30.952,43.908
NetP12_7: P12.7 Q18.3 | length 14.9
  Top Layer w0.5: P12.7@27.432,38.608 28.913,37.127 30.396,37.127 37.177,43.908 Q18.3@38.862,43.908
NetP12_8: P12.8 Q19.3 | length 9.7
  Top Layer w0.5: P12.8@27.432,41.148 28.686,39.894 30.893,39.894 Q19.3@34.907,43.908
NetP14_1: P14.1 R212.2 | length 7
  Bottom Layer w1: R212.2@5.969,94.885 5.985,94.869 P14.1@12.994,94.869
NetP14_2: P14.2 R209.2 | length 7.3
  Bottom Layer w1: P14.2@17.994,94.869 25.257,94.869 R209.2@25.273,94.885
NetQ1_1: Q1.1 R161.1 | length 2.3
  Bottom Layer w0.5: Q1.1@132.268,6.951 132.334,6.885 R161.1@132.334,4.66
NetQ2_1: Q2.1 R171.1 | length 2.3
  Bottom Layer w0.5: R171.1@136.271,4.66 136.332,4.721 Q2.1@136.332,6.951
NetQ3_1: Q3.1 R181.1 | length 2.2
  Bottom Layer w0.5: Q3.1@140.142,6.951 140.142,4.853 R181.1@140.208,4.787
NetQ4_1: Q4.1 R195.1 | length 3.9
  Top Layer w0.5: Q4.1@20.036,46.008 20.036,47.219 ; R195.1@20.066,48.453 20.036,48.423 20.036,47.219 ; R195.1@20.151,48.58 20.151,47.333 20.036,47.219
NetQ5_1: Q5.1 R193.1 | length 3.8
  Top Layer w0.5: Q5.1@16.081,46.008 16.081,47.219 ; R193.1@16.081,48.374 16.081,47.219 ; R193.1@16.205,48.58 16.205,47.343 16.081,47.219
NetQ6_1: Q6.1 R200.1 | length 3.8
  Top Layer w0.5: Q6.1@27.947,46.008 27.947,47.244 ; R200.1@27.947,48.446 27.947,47.244 ; R200.1@28.042,48.58 28.042,47.339 27.947,47.244
NetQ7_1: Q7.1 R197.1 | length 3.9
  Top Layer w0.5: Q7.1@23.991,46.008 23.991,47.219 ; R197.1@24.003,48.453 23.991,48.441 23.991,47.219 ; R197.1@24.096,48.58 24.096,47.323 23.991,47.219
NetQ8_1: Q8.1 R207.1 | length 24.7
  Top Layer w0.5: v1(52.959,53.594) R207.1@52.959,55.306
  Top Layer w1: R207.1@53.025,55.372 R207.1@53.152,55.499
  Bottom Layer w0.5: Q8.1@35.857,43.908 35.857,46.753 39.522,50.419 45.39,50.419 48.641,53.67 52.375,53.67 52.451,53.594 v1(52.959,53.594)
NetQ8_3: Q8.3 R191.1 R208.2 | length 12.8
  Top Layer w0.5: v1(33.909,47.549) 33.909,51.816 34.991,52.898 R191.1@35.941,52.898 35.941,51.689 35.941,51.672 35.933,51.664 R208.2@35.933,50.48
  Top Layer w1: R208.2@35.941,50.353 35.941,51.672 ; 35.941,51.689 35.941,52.07
  Bottom Layer w0.5: v1(33.909,47.549) 34.907,46.551 Q8.3@34.907,46.008
NetQ9_1: Q9.1 R205.1 | length 22.2
  Top Layer w0.5: v1(51.329,52.045) 51.329,54.978 51.562,55.211 51.562,56.642 52.397,57.477 R205.1@53.152,57.477
  Top Layer w1: R205.1@53.079,57.404 R205.1@53.152,57.477
  Bottom Layer w0.5: Q9.1@39.812,43.908 39.812,44.856 40.736,45.78 45.065,45.78 v1(51.329,52.045)
NetQ9_3: Q9.3 R190.1 R206.2 | length 8
  Top Layer w0.5: R206.2@39.878,50.48 40.767,50.48 41.661,50.48 R190.1@41.783,50.358 ; R190.1@41.783,50.292 R190.1@41.849,50.292
  Top Layer w1: v1@41.783,48.641 41.783,50.292 R190.1@41.783,50.358
  Bottom Layer w0.5: Q9.3@38.862,46.008 38.862,45.72 v1@41.656,48.514
  other v1: 41.783,48.768
NetQ10_1: Q10.1 R203.1 | length 31.4
  Top Layer w0.5: v1(51.359,58.946) 51.867,59.454 R203.1@53.152,59.454
  Top Layer w1: 51.943,59.436 R203.1@53.134,59.436
  Bottom Layer w0.5: Q10.1@31.902,43.908 31.902,45.11 32.77,45.978 32.77,49.026 36.195,52.451 44.864,52.451 v1(51.359,58.946)
NetQ10_3: Q10.3 R189.1 R204.2 | length 8.5
  Top Layer w0.5: R204.2@32.004,50.497 R189.1@32.004,52.898
  Bottom Layer w0.5: Q10.3@30.952,46.008 30.952,49.445 32.004,50.497 v1(32.004,51.689)
NetQ11_1: Q11.1 R201.1 | length 53.9
  Top Layer w0.5: v1(36.449,62.357) 37.211,63.119 48.314,63.119 50.002,61.432 R201.1@53.152,61.432
  Bottom Layer w0.5: Q11.1@12.126,43.908 12.126,45.654 13.529,47.057 13.529,52.443 14.224,53.138 15.585,53.138 24.803,62.357 v1(36.449,62.357)
NetQ11_3: Q11.3 R188.1 R202.2 | length 9.3
  Top Layer w0.3: R202.2@12.192,50.546 R202.2@12.194,50.546
  Top Layer w0.5: R202.2@12.192,50.48 R202.2@12.26,50.48 ; R202.2@12.192,50.546 v1(12.192,51.816)
  Top Layer w1: R188.1@10.541,50.48 12.192,50.48 R202.2@12.192,50.353
  Bottom Layer w0.5: Q11.3@11.176,46.008 11.176,47.498 12.192,48.514 v1(12.192,51.816)
NetQ12_1: Q12.1 R199.1 | length 40.6
  Top Layer w0.5: v1(51.79,63.409) R199.1@53.152,63.409
  Top Layer w0.7: v1@51.816,63.373 53.116,63.373 R199.1@53.152,63.409
  Bottom Layer w0.5: Q12.1@27.947,43.908 27.947,51.188 30.226,53.467 44.706,53.467 48.641,57.402 48.641,58.459 51.37,61.189 51.37,62.989 v1(51.79,63.409)
NetQ12_3: Q12.3 R187.1 R200.2 | length 8.4
  Top Layer w0.5: v1(26.568,50.114) 26.934,50.48 R200.2@28.042,50.48 28.042,51.638 27.94,51.74 R187.1@27.94,52.898
  Bottom Layer w0.5: v1(26.568,50.114) 26.997,49.686 Q12.3@26.997,46.008
NetQ13_1: Q13.1 R196.1 | length 45.7
  Top Layer w0.5: v1(49.31,63.879) 50.818,65.387 R196.1@53.152,65.387
  Top Layer w0.7: R196.1@53.043,65.278 R196.1@53.152,65.387
  Bottom Layer w0.5: Q13.1@23.991,43.908 23.991,52.312 26.1,54.421 44.196,54.421 47.658,57.883 47.658,62.227 v1(49.31,63.879)
NetQ13_3: Q13.3 R186.1 R197.2 | length 11.1
  Top Layer w0.5: v1(22.53,52.4) 23.038,52.4 24.003,51.435 24.096,51.342 ; R186.1@24.003,52.898 24.003,51.731 24.096,51.638 24.096,51.342 ; R197.2@24.096,50.48 24.096,51.342
  Bottom Layer w0.5: v1(22.53,52.4) 23.041,51.889 Q13.3@23.041,46.008
NetQ14_1: Q14.1 R194.1 | length 52.5
  Top Layer w0.5: v1(51.235,67.364) R194.1@53.152,67.364
  Top Layer w0.7: v1@51.054,67.31 53.098,67.31 R194.1@53.152,67.364
  Bottom Layer w0.5: Q14.1@20.036,43.908 20.036,44.293 21.391,45.648 21.391,53.798 23.673,56.08 33.143,56.08 34.467,57.404 44.958,57.404 46.736,59.182 46.736,63.246 48.641,65.151 49.276,65.151 51.235,67.11 v1(51.235,67.364)
NetQ14_3: Q14.3 R185.1 R195.2 | length 11
  Top Layer w0.5: v1(18.694,51.232) 18.898,51.029 R195.2@20.066,51.029 ; R185.1@20.066,52.898 20.066,51.562 R195.2@20.066,51.029 ; R195.2@20.066,51.029 20.151,51.029 R195.2@20.151,50.48 20.066,50.48 R195.2@20.066,51.029
  Top Layer w1: R195.2@20.066,50.353 R195.2@20.066,50.48
  Bottom Layer w0.5: v1(18.694,51.232) 19.304,51.232 19.685,50.851 19.685,48.757 19.086,48.158 Q14.3@19.086,46.008
NetQ15_1: Q15.1 R192.1 | length 55.6
  Top Layer w0.5: v1(50.673,68.834) 51.181,69.342 R192.1@53.152,69.342
  Bottom Layer w0.5: Q15.1@16.081,43.908 16.081,51.58 23.136,58.635 44.157,58.635 45.673,60.151 45.673,65.04 46.685,66.052 49.034,66.052 49.657,66.675 49.657,67.818 v1(50.673,68.834)
NetQ15_3: Q15.3 R184.1 R193.2 | length 12.3
  Top Layer w0.5: v1(14.681,51.841) 16.002,50.521 16.043,50.48 R193.2@16.129,50.48 ; R184.1@16.129,52.898 R193.2@16.129,50.48 ; R193.2@16.205,50.48 R193.2@16.129,50.48
  Top Layer w1: R193.2@16.002,50.353 16.002,50.521 16.002,52.07
  Bottom Layer w0.5: v1(14.681,51.841) 14.834,51.841 15.131,51.544 Q15.3@15.131,46.008
NetQ16_1: Q16.1 R202.1 | length 2.5
  Top Layer w0.5: Q16.1@12.126,46.008 12.126,47.219 12.126,48.387 R202.1@12.192,48.453
NetQ17_1: Q17.1 R204.1 | length 2.7
  Top Layer w0.5: Q17.1@31.902,46.008 31.902,48.428 31.902,48.58 R204.1@31.987,48.58
NetQ18_1: Q18.1 R206.1 | length 3.8
  Top Layer w0.5: Q18.1@39.812,46.008 39.812,47.244 ; R206.1@39.878,48.58 R206.1@39.878,48.453 ; 39.812,47.244 39.878,47.31 R206.1@39.878,48.453 ; 39.812,47.244 39.812,48.387 R206.1@39.878,48.453
NetQ19_1: Q19.1 R208.1 | length 3.9
  Top Layer w0.5: Q19.1@35.857,46.008 35.857,47.168 ; R208.1@35.857,48.369 35.857,47.168 ; R208.1@35.933,48.58 35.839,48.58 35.839,47.185 35.857,47.168
NetQ20_1: Q20.1 R219.2 TR1.1 | length 27.7
  Bottom Layer w0.5: R219.2@54.544,81.026 55.066,80.504 Q20.1@57.325,80.504 57.565,80.264 67.691,80.264 70.104,77.851 TR1.1@70.104,67.056
NetQ20_2: Q20.2 Q20.4 TR1.5 | length 15.3
  Bottom Layer w1: Q20.2@57.325,82.804 Q20.4@63.325,82.804 67.564,82.804 TR1.5@71.12,79.248
NetQ21_1: Q21.1 R220.1 TR1.2 | length 13
  Bottom Layer w0.5: Q21.1@57.198,69.201 TR1.2@67.564,69.201
  Bottom Layer w1: R220.1@54.544,69.215 57.184,69.215 Q21.1@57.198,69.201
NetQ21_2: Q21.2 Q21.4 TR1.3 | length 10
  Bottom Layer w1: Q21.2@57.198,71.501 Q21.4@63.198,71.501 64.389,71.501 66.04,73.152 TR1.3@66.548,73.152
NetQ22_1: Q22.1 R125.2
NetQ22_3: Q22.3 R127.2 U14.2 U14.3 | length 6.6
  Top Layer w0.5: 108.204,84.328 108.204,86.995
  Top Layer w0.7: U14.2@107.696,90.183 108.204,90.183 ; 108.204,86.995 108.204,90.183 ; U14.3@108.458,90.183 108.204,90.183
NetQ23_1: Q23.1 R130.1
NetQ24_1: Q24.1 R227.2
NetQ24_3: Q24.3 R229.2 U14.4 | length 1.4
  Top Layer w0.5: U14.4@109.982,90.183 R229.2@111.379,90.183
NetR1_2: R1.2 U1.15 | length 18.2
  Bottom Layer w0.5: R1.2@21.844,12.507 21.844,15.875 25.654,19.685 25.654,23.749 22.86,26.543 U1.15@22.86,27.927
NetR2_2: R2.2 U1.1 | length 12.6
  Bottom Layer w0.7: R2.2@19.304,12.507 19.304,14.859 24.13,19.685 U1.1@24.13,23.127
NetR3_2: R3.2 U1.2 | length 13.1
  Bottom Layer w0.7: R3.2@16.764,12.507 16.764,13.97 22.86,20.066 U1.2@22.86,23.127
NetR5_2: R5.2 U1.3 | length 13.7
  Bottom Layer w0.7: R5.2@14.224,12.507 14.224,13.081 21.59,20.447 U1.3@21.59,23.127
NetR6_2: R6.2 U1.4 | length 14.8
  Bottom Layer w0.5: R6.2@11.684,12.507 11.684,13.208 12.7,14.224 13.716,14.224 20.32,20.828 U1.4@20.32,23.127
NetR7_2: R7.2 U1.5 | length 16.7
  Bottom Layer w0.7: R7.2@9.144,12.507 9.144,14.732 10.16,15.748 13.462,15.748 19.05,21.336 U1.5@19.05,23.127
NetR8_2: R8.2 U1.6 | length 17.6
  Bottom Layer w0.7: R8.2@6.604,12.507 6.604,14.478 8.89,16.764 12.827,16.764 17.78,21.717 U1.6@17.78,23.127
NetR9_2: R9.2 U1.7 | length 18.5
  Bottom Layer w0.7: R9.2@4.064,12.507 4.064,14.351 7.874,18.161 12.573,18.161 16.51,22.098 U1.7@16.51,23.127
NetR10_2: R10.2 U2.15 | length 30.3
  Top Layer w0.5: R10.2@4.064,12.507 4.064,15.367 v1(8.636,19.939) ; v1(4.064,20.066) 5.961,21.963 10.787,21.963 14.478,25.654 15.621,25.654 16.51,26.543 U2.15@16.51,27.927
  Bottom Layer w0.5: v1(4.064,20.066) v1@8.509,20.066
NetR11_2: R11.2 U2.1 | length 14.2
  Top Layer w0.7: R11.2@6.604,12.507 6.604,14.491 U2.1@15.24,23.127
NetR12_2: R12.2 U2.2 | length 13.7
  Top Layer w0.7: R12.2@9.144,12.507 9.144,14.732 16.51,22.098 U2.2@16.51,23.127
NetR14_2: R14.2 U2.3 | length 13.1
  Top Layer w0.7: R14.2@11.684,12.507 11.684,15.621 17.78,21.717 U2.3@17.78,23.127
NetR15_2: R15.2 U2.4 | length 12.6
  Top Layer w0.7: R15.2@14.224,12.507 14.224,16.51 19.05,21.336 U2.4@19.05,23.127
NetR16_2: R16.2 U2.5 | length 12.1
  Top Layer w0.7: R16.2@16.764,12.507 16.764,17.241 20.32,20.797 U2.5@20.32,23.127
NetR17_2: R17.2 U2.6 | length 11.6
  Top Layer w0.7: R17.2@19.304,12.507 19.304,18.161 21.59,20.447 U2.6@21.59,23.127
NetR18_2: R18.2 U2.7 | length 11
  Top Layer w0.7: R18.2@21.844,12.507 21.844,19.05 22.86,20.066 U2.7@22.86,23.127
NetR19_2: R19.2 U3.15 | length 19.5
  Top Layer w0.5: R19.2@24.384,12.507 24.384,16.447 34.353,26.416 34.353,26.607 U3.15@34.353,27.927
NetR20_2: R20.2 U3.1 | length 13.2
  Top Layer w0.5: R20.2@26.924,12.507 26.924,16.968 U3.1@33.084,23.127
NetR21_2: R21.2 U3.2 | length 12.6
  Top Layer w0.5: R21.2@29.464,12.507 29.464,16.637 34.353,21.526 U3.2@34.353,23.127
NetR23_2: R23.2 U3.3 | length 12.1
  Top Layer w0.5: R23.2@32.004,12.507 32.004,17.399 35.623,21.018 U3.3@35.623,23.127
NetR24_2: R24.2 U3.4 | length 11.6
  Top Layer w0.5: R24.2@34.544,12.507 34.544,18.288 36.893,20.637 U3.4@36.893,23.127
NetR25_2: R25.2 U3.5 | length 11.1
  Top Layer w0.5: R25.2@37.084,12.507 37.084,17.018 38.163,18.098 U3.5@38.163,23.127
NetR26_2: R26.2 U3.6 | length 10.7
  Top Layer w0.5: U3.6@39.433,23.127 39.433,17.894 39.624,17.704 R26.2@39.624,12.507
NetR27_2: R27.2 U3.7 | length 11.2
  Top Layer w0.5: U3.7@40.703,23.127 40.703,17.59 42.164,16.129 R27.2@42.164,12.507
NetR28_2: R28.2 U4.15 | length 17.4
  Top Layer w0.5: R28.2@44.704,12.507 44.704,16.434 44.069,17.069 44.069,24.105 44.933,24.968 46.228,24.968 46.482,25.222 U4.15@46.482,27.927
NetR29_2: R29.2 U4.1 | length 11.5
  Top Layer w0.7: U4.1@45.212,23.127 45.212,17.526 47.244,15.494 R29.2@47.244,12.507
NetR30_2: R30.2 U4.2 | length 12
  Top Layer w0.7: U4.2@46.482,23.127 46.482,18.034 49.784,14.732 R30.2@49.784,12.507
NetR34_2: R34.2 U4.3 | length 12.5
  Top Layer w0.7: U4.3@47.752,23.127 47.752,18.796 52.324,14.224 R34.2@52.324,12.507
NetR35_2: R35.2 U4.4 | length 12
  Top Layer w0.5: U4.4@49.022,23.127 49.022,19.685 49.911,18.796 v1(52.324,16.383)
  Bottom Layer w0.5: R35.2@52.324,12.507 v1(52.324,16.383)
NetR36_2: R36.2 U4.5 | length 10.8
  Top Layer w0.5: v1(50.292,20.193) 50.292,20.701 U4.5@50.292,23.127
  Bottom Layer w0.5: R36.2@49.784,12.507 49.784,19.685 v1(50.292,20.193)
NetR37_2: R37.2 U4.6 | length 16.9
  Top Layer w0.5: U4.6@51.562,23.127 51.562,21.336 v1(52.197,20.701)
  Bottom Layer w0.5: R37.2@47.244,12.507 47.244,21.209 47.641,21.606 51.292,21.606 v1(52.197,20.701)
NetR38_2: R38.2 U4.7 | length 28.2
  Top Layer w0.5: v1(52.197,18.796) 53.721,20.32 53.721,21.209 52.832,22.098 U4.7@52.832,23.127
  Bottom Layer w0.5: R38.2@44.704,12.507 44.704,21.336 46.482,23.114 52.578,23.114 53.721,21.971 53.721,20.32 v1(52.197,18.796)
NetR39_2: R39.2 U5.15 | length 17.1
  Bottom Layer w0.5: U5.15@40.64,27.927 40.64,26.416 43.434,23.622 43.434,17.399 42.164,16.129 R39.2@42.164,12.507
NetR40_2: R40.2 U5.1 | length 11.6
  Bottom Layer w0.5: R40.2@39.624,12.507 39.624,16.002 41.91,18.288 U5.1@41.91,23.127
NetR41_2: R41.2 U5.2 | length 12.1
  Bottom Layer w0.7: R41.2@37.084,12.507 37.084,15.24 40.64,18.796 U5.2@40.64,23.127
NetR43_2: R43.2 U5.3 | length 12.6
  Bottom Layer w0.5: R43.2@34.544,12.507 34.544,14.478 39.37,19.304 U5.3@39.37,23.127
NetR44_2: R44.2 U5.4 | length 13.1
  Bottom Layer w0.7: R44.2@32.004,12.507 32.004,13.589 38.1,19.685 U5.4@38.1,23.127
NetR45_2: R45.2 U5.5 | length 13.7
  Bottom Layer w0.7: R45.2@29.464,12.507 29.464,13.208 36.83,20.574 U5.5@36.83,23.127
NetR46_2: R46.2 U5.6 | length 14.7
  Bottom Layer w0.5: R46.2@26.924,12.507 26.924,13.27 28.129,13.524 35.56,20.955 U5.6@35.56,23.127
NetR47_2: R47.2 U5.7 | length 17.2
  Bottom Layer w0.5: R47.2@24.384,12.507 24.384,15.621 29.591,20.828 33.782,20.828 34.29,21.336 U5.7@34.29,23.127
NetR114_1: R114.1 U12.21 | length 5.7
  Top Layer w0.5: R114.1@105.41,66.636 105.41,67.564 v1(106.934,69.088)
  Bottom Layer w0.5: U12.21@106.426,66.653 106.426,68.58 v1(106.934,69.088)
NetR115_1: R115.1 U12.22 | length 9.7
  Top Layer w0.5: R115.1@106.934,66.636 106.934,67.437 108.123,68.626 108.123,71.039 v1(108.204,71.12)
  Bottom Layer w0.5: U12.22@107.696,66.653 107.696,67.899 108.123,68.326 108.123,71.039 v1(108.204,71.12)
NetR116_1: R116.1 U10.6 | length 63.2
  Top Layer w1: v1@94.742,60.071 94.623,60.19 94.623,64.397 97.116,66.89 R116.1@97.116,67.818
  Bottom Layer w0.5: U10.6@51.816,42.659 51.816,46.405 61.52,56.109 67.88,56.109 74.124,62.353 90.039,62.353 92.321,60.071 v1(94.869,60.071)
NetR117_1: R117.1 U12.23 | length 5.7
  Top Layer w0.5: R117.1@108.458,66.636 R117.1@108.458,66.71
  Top Layer w0.6: R117.1@108.458,66.71 108.458,67.437 109.474,68.453 v1(109.474,69.088)
  Bottom Layer w0.5: U12.23@108.966,66.653 108.966,68.834 109.22,69.088 v1(109.474,69.088)
NetR118_1: R118.1 U12.24 | length 9.6
  Top Layer w0.5: R118.1@109.982,66.636 109.982,67.264 110.663,67.945 110.663,71.166 v1(110.704,71.207)
  Bottom Layer w0.5: U12.24@110.236,66.653 110.236,67.899 110.663,68.326 110.663,71.166 v1(110.704,71.207)
NetR119_1: R119.1 U12.25 | length 5.3
  Top Layer w0.5: R119.1@111.506,66.636 111.76,66.89 111.76,68.834 v1(112.014,69.088)
  Bottom Layer w0.5: U12.25@111.506,66.653 111.506,68.58 v1(112.014,69.088)
NetR120_1: R120.1 U12.26 | length 8.6
  Top Layer w0.5: v1(112.843,70.672) 113.284,70.231 113.284,68.08 113.03,67.826 R120.1@113.03,66.636
  Bottom Layer w0.5: U12.26@112.776,66.653 112.776,67.949 113.153,68.326 113.153,70.362 v1(112.843,70.672)
NetR124_2: R124.2 R125.1 U13.6
NetR126_1: R126.1 U13.1
NetR128_2: R128.2 R130.2 U15.5
NetR129_1: R129.1 U15.1
NetR129_2: R129.2 U14.1 | length 2
  Top Layer w0.7: R129.2@106.172,88.199 U14.1@106.172,90.183
NetR135_2: R135.2 R227.1 U16.5
NetR136_1: R136.1 U17.15 | length 30.3
  Bottom Layer w0.5: U17.15@131.458,83.185 132.461,83.185 134.747,85.471 148.082,85.471 156.845,76.708 R136.1@156.845,76.415
NetR137_1: R137.1 U17.1 | length 21.6
  Bottom Layer w0.5: U17.1@136.258,84.455 146.685,84.455 154.305,76.835 R137.1@154.305,76.415
NetR138_1: R138.1 U17.2 | length 18.3
  Bottom Layer w0.5: U17.2@136.258,83.185 144.995,83.185 R138.1@151.765,76.415
NetR140_1: R140.1 U17.3 | length 15.2
  Bottom Layer w0.5: U17.3@136.258,81.915 143.725,81.915 R140.1@149.225,76.415
NetR141_1: R141.1 U17.4 | length 12.2
  Bottom Layer w0.5: U17.4@136.258,80.645 142.455,80.645 R141.1@146.685,76.415
NetR142_1: R142.1 U17.5 | length 9.1
  Bottom Layer w0.5: U17.5@136.258,79.375 141.185,79.375 R142.1@144.145,76.415
NetR143_1: R143.1 U17.6 | length 6
  Bottom Layer w0.5: U17.6@136.258,78.105 139.915,78.105 R143.1@141.605,76.415
NetR144_1: R144.1 U17.7 | length 3
  Bottom Layer w0.5: U17.7@136.258,76.835 138.645,76.835 R144.1@139.065,76.415
NetR145_1: R145.1 U18.15 | length 30.3
  Bottom Layer w0.5: U18.15@131.458,68.072 132.588,68.072 135.001,70.485 148.209,70.485 156.845,61.849 R145.1@156.845,61.556
NetR146_1: R146.1 U18.1 | length 21.4
  Bottom Layer w0.5: U18.1@136.258,69.342 146.812,69.342 154.305,61.849 R146.1@154.305,61.556